# Altium PCB racer.PcbDoc (part 2 of 2)
Units mm, origin at the board's own origin, x right, y up, seen from the top; angles counter-clockwise.
Board outline 64 x 85 mm, 4 copper layers (Top Layer, Ground Plane, Power Plane, Bottom Layer), stack 0.844 mm thick; 123 components, 70 nets, 323 pads, 48 vias.
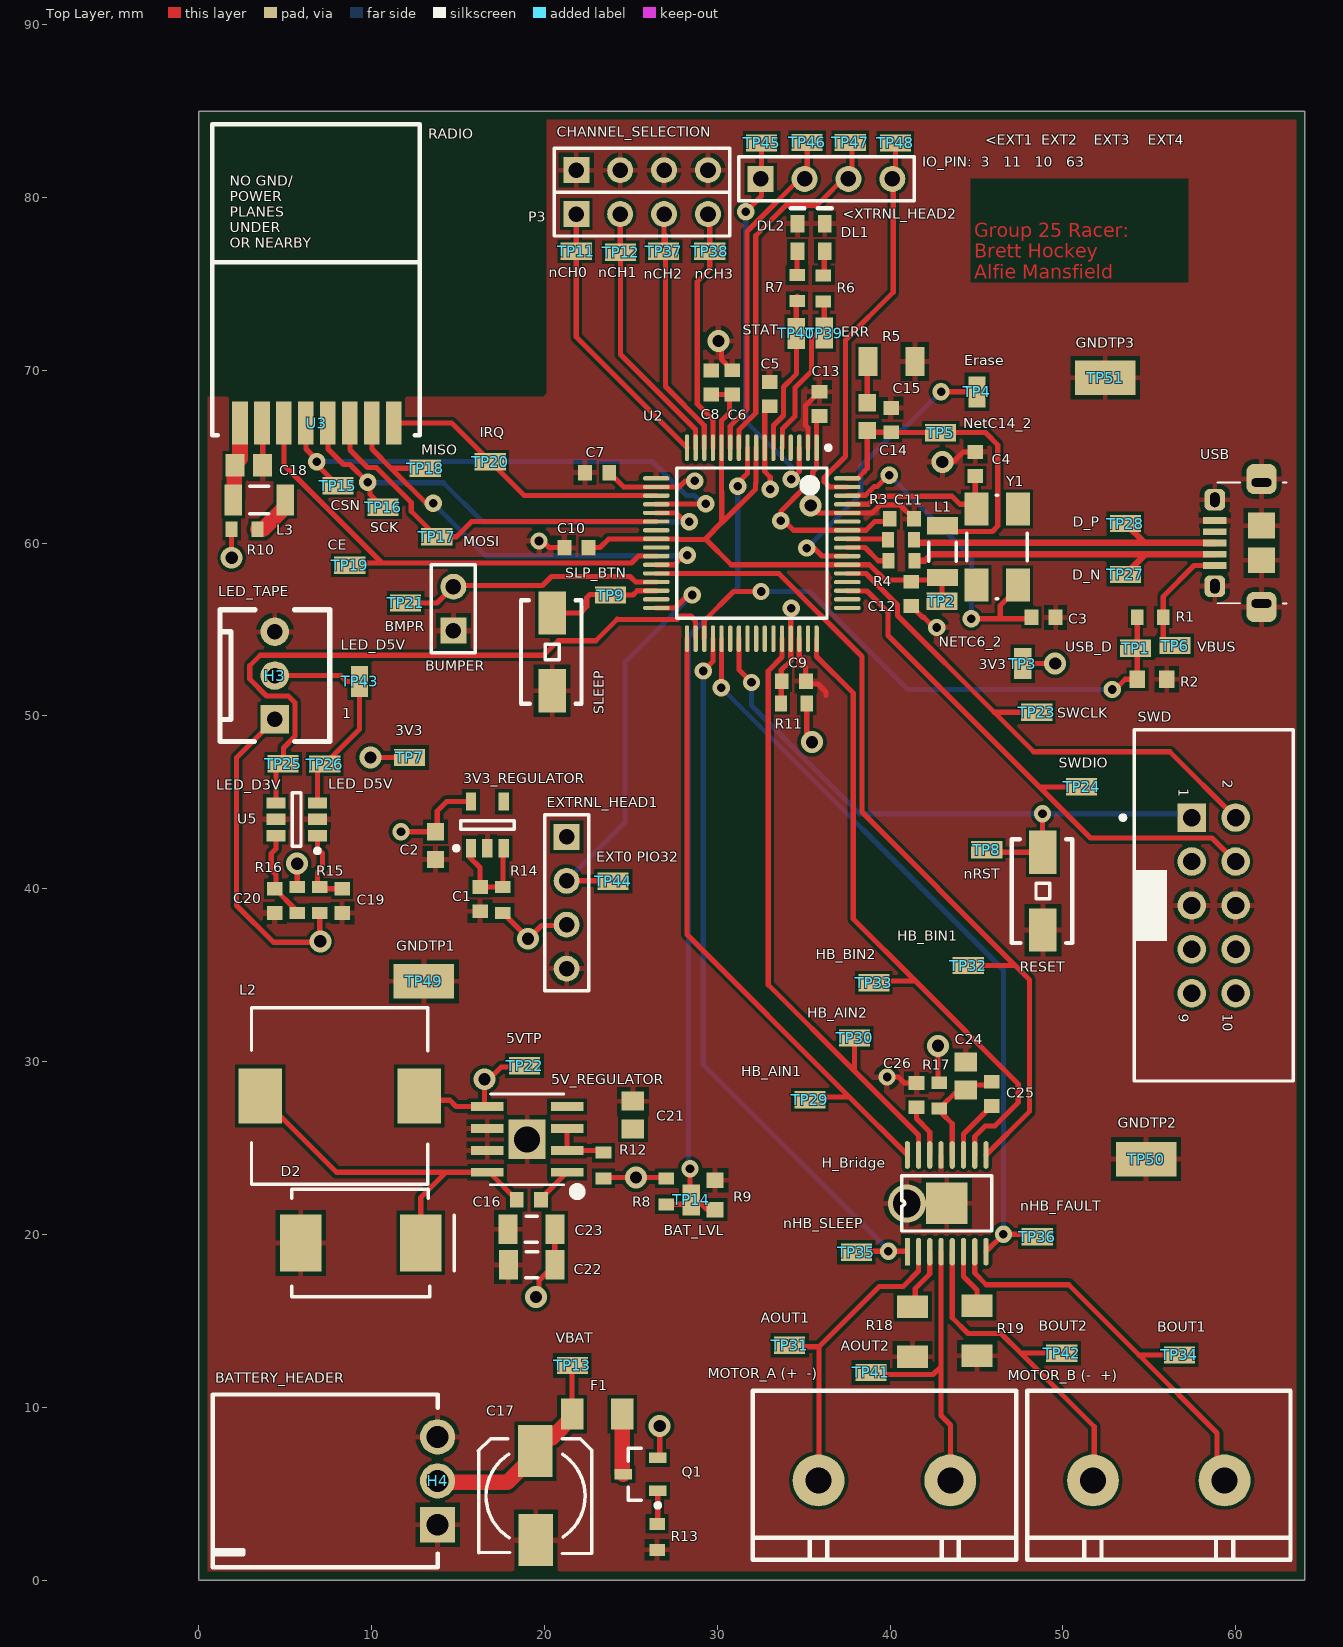
[diagram p0: Top Layer view]

## Other copper (continued)
Power Plane (plane layer: these items are gaps in the copper): (continued)
  lines w0.254: -1.194,39.37 18.466,39.37 21.692,36.144 21.692,16.916 19.837,15.062 -0.051,15.062 ; 23.508,27.114 23.52,27.102 ; 23.52,27.102 23.52,28.092 27.102,31.674 27.889,32.461 44.039,32.461 46.888,29.612 46.888,-0.412 46.6,-0.7 23.52,-0.7 23.52,27.102 ; 27.305,55.702 27.457,55.55 36.297,55.55 36.398,55.651 36.398,64.414 36.195,64.618 27.305,64.618 27.305,55.702

## Silkscreen, mask and mechanical layers (free items; w line width, h text height)
Top Overlay:
  text "IO_PIN:  3   11   10   63" at 41.859,81.788 h0.6
Board Outline:
  the board outline again, w0.254

## Dimensions
0,86 to 64,86 on Mechanical 1
65,85 to 65,0 on Mechanical 1

## Text inside footprints (layer, text, board x,y; h text height)
5V_REGULATOR: Mechanical 13 "*" at 20.93,24.344 h0.6 r180
H3: Top Overlay "1" at 8.306,49.86 h0.6
SWD: Top Overlay "9" at 56.705,32.76 h0.6 r270; Top Overlay "10" at 59.245,32.76 h0.6 r270; Top Overlay "1" at 56.705,45.82 h0.6 r270; Top Overlay "2" at 59.245,46.32 h0.6 r270
U3: Top Overlay "NO GND/ / POWER / PLANES / UNDER / OR NEARBY" at 1.803,77.089 h0.6
USB: Mechanical 1 "PCB Edge" at 63.763,57.861 h0.6 r90